# EAGLE board version1 (EAGLE 6.1)
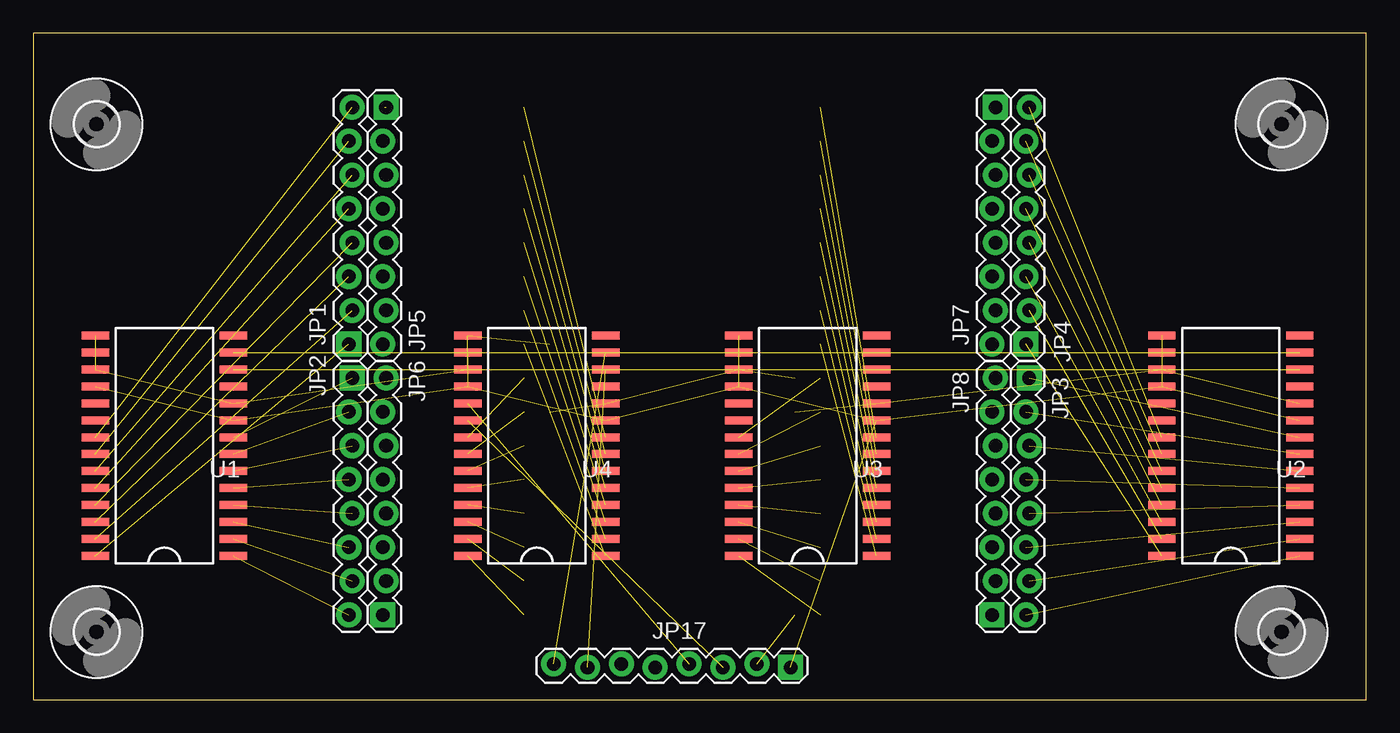
[diagram p0: board, top side]
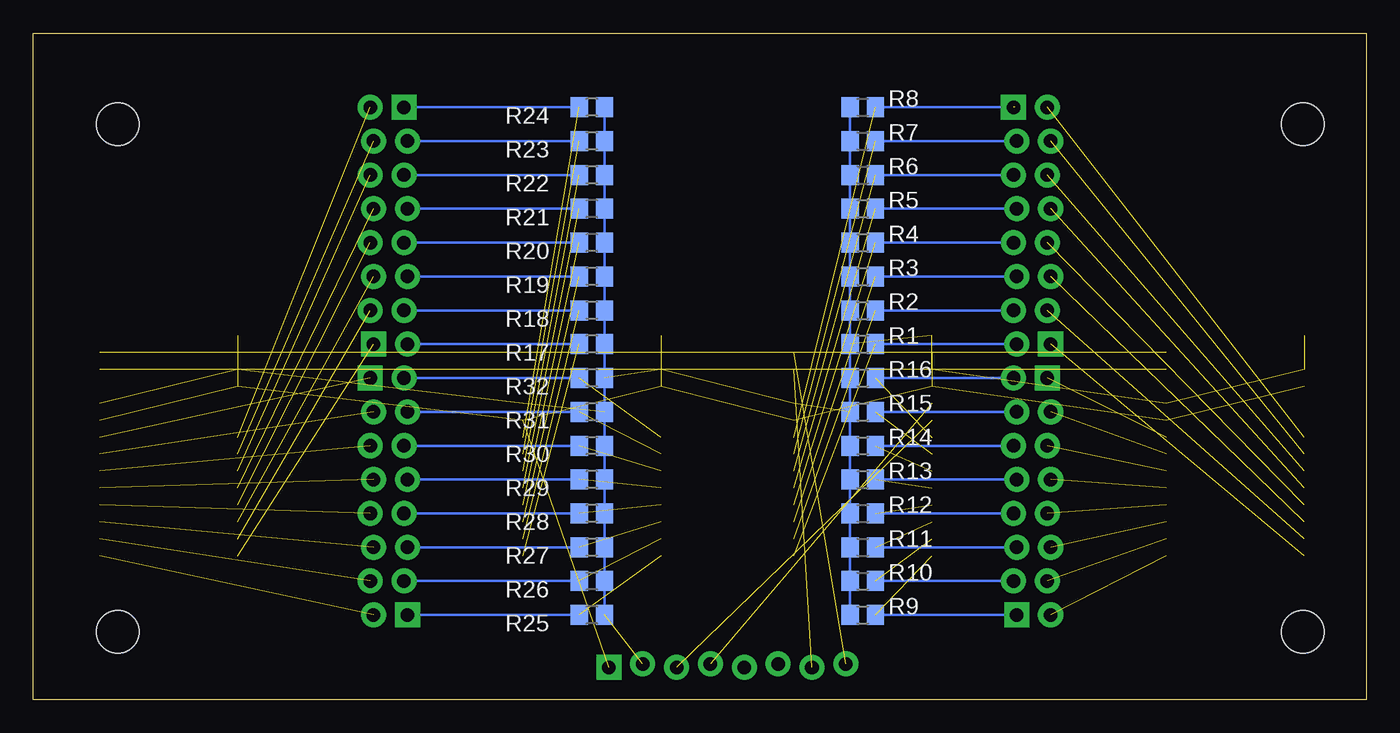
[diagram p1: board, bottom side, seen from below]

Size 100 x 50 mm. Coordinates in mm from the lower left corner, seen from the top.
Outline: 100,0 100,50 0,50 0,0 100,0
Copper layers (1*16): Top 0.035mm / dielectric 1.5mm / Bottom 0.035mm
Design rules: minimum track width 6mil, minimum drill 12mil, track to track 8mil, track to pad 8mil, pad to pad 8mil, via to via 8mil, smd to smd 0mil, copper to edge 10mil, drill to drill 13mil, minimum pad ring 10mil, minimum via ring 6mil, stop-mask expansion 2mil, vias tented up to drill 100mil, thermal gap 10mil
Net classes: 0 default: width 0.203 mm, drill 0.254 mm, clearance 0.203 mm; 1 power: width 0.406 mm, drill 0.305 mm, clearance 0.203 mm to class 0, clearance 0.254 mm

## Footprints (pad centres in the part's own frame; a part is rotated, then mirrored left to right if it is on the bottom)
3,2 = hole 3.2: 0,0
1X08_LOCK = drill 1.016 pad 1.88 square: 1 0,0.127 | drill 1.016 pad 1.88: 2 2.54,-0.127; 3 5.08,0.127; 4 7.62,-0.127; 5 10.16,0.127; 6 12.7,-0.127; 7 15.24,0.127; 8 17.78,-0.127
R0805 = smd 1.3 x 1.5: 1 -0.95,0; 2 0.95,0
MCP23017A = smd 2.05 x 0.6: 1 -5.177,8.255; 2 -5.177,6.985; 3 -5.177,5.715; 4 -5.177,4.445; 5 -5.177,3.175; 6 -5.177,1.905; 7 -5.177,0.635; 8 -5.177,-0.635; 9 -5.177,-1.905; 10 -5.177,-3.175; 11 -5.177,-4.445; 12 -5.177,-5.715; 13 -5.177,-6.985; 14 -5.177,-8.255; 15 5.177,-8.255; 16 5.177,-6.985; 17 5.177,-5.715; 18 5.177,-4.445; 19 5.177,-3.175; 20 5.177,-1.905; 21 5.177,-0.635; 22 5.177,0.635; 23 5.177,1.905; 24 5.177,3.175; 25 5.177,4.445; 26 5.177,5.715; 27 5.177,6.985; 28 5.177,8.255

## Placement (x,y rotation side)
H1  MOUNT-HOLE3.2  [3,2]  93.65,5.08 90 top
H2  MOUNT-HOLE3.2  [3,2]  93.65,43.18 90 top
H3  MOUNT-HOLE3.2  [3,2]  4.75,43.18 90 top
H4  MOUNT-HOLE3.2  [3,2]  4.75,5.08 90 top
JP1  [1X08_LOCK]  23.8,26.67 90 top
JP2  [1X08_LOCK]  23.8,24.13 270 top
JP3  [1X08_LOCK]  74.6,24.13 270 top
JP4  [1X08_LOCK]  74.6,26.67 90 top
JP5  [1X08_LOCK]  26.34,44.45 270 top
JP6  [1X08_LOCK]  26.34,6.35 90 top
JP7  [1X08_LOCK]  72.06,44.45 270 top
JP8  [1X08_LOCK]  72.06,6.35 90 top
JP17  [1X08_LOCK]  56.82,2.54 180 top
R1  [R0805]  37.77,26.67 0 bottom
R2  [R0805]  37.77,29.21 0 bottom
R3  [R0805]  37.77,31.75 0 bottom
R4  [R0805]  37.77,34.29 0 bottom
R5  [R0805]  37.77,36.83 0 bottom
R6  [R0805]  37.77,39.37 0 bottom
R7  [R0805]  37.77,41.91 0 bottom
R8  [R0805]  37.77,44.45 0 bottom
R9  [R0805]  37.77,6.35 0 bottom
R10  [R0805]  37.77,8.89 0 bottom
R11  [R0805]  37.77,11.43 0 bottom
R12  [R0805]  37.77,13.97 0 bottom
R13  [R0805]  37.77,16.51 0 bottom
R14  [R0805]  37.77,19.05 0 bottom
R15  [R0805]  37.77,21.59 0 bottom
R16  [R0805]  37.77,24.13 0 bottom
R17  [R0805]  58.09,26.67 180 bottom
R18  [R0805]  58.09,29.21 180 bottom
R19  [R0805]  58.09,31.75 180 bottom
R20  [R0805]  58.09,34.29 180 bottom
R21  [R0805]  58.09,36.83 180 bottom
R22  [R0805]  58.09,39.37 180 bottom
R23  [R0805]  58.09,41.91 180 bottom
R24  [R0805]  58.09,44.45 180 bottom
R25  [R0805]  58.09,6.35 180 bottom
R26  [R0805]  58.09,8.89 180 bottom
R27  [R0805]  58.09,11.43 180 bottom
R28  [R0805]  58.09,13.97 180 bottom
R29  [R0805]  58.09,16.51 180 bottom
R30  [R0805]  58.09,19.05 180 bottom
R31  [R0805]  58.09,21.59 180 bottom
R32  [R0805]  58.09,24.13 180 bottom
U1  LIGHTSA  [MCP23017A]  9.83,19.05 180 top
U2  LIGHTSB  [MCP23017A]  89.84,19.05 180 top
U3  ButtonB  [MCP23017A]  58.09,19.05 180 top
U4  ButtonA  [MCP23017A]  37.77,19.05 180 top

## Library data of the parts
H1-H4 = holes
JP1-JP8 JP17 = SparkFun
R1-R32 = rcl
U1-U4 = brv_v6_2

## Nets
GND: JP17.2 R1.1 R2.1 R3.1 R4.1 R5.1 R6.1 R7.1 R8.1 R9.1 R10.1 R11.1 R12.1 R13.1 R14.1 R15.1 R16.1 R17.1 R18.1 R19.1 R20.1 R21.1 R22.1 R23.1 R24.1 R25.1 R26.1 R27.1 R28.1 R29.1 R30.1 R31.1 R32.1 U1.10 U1.15 U1.16 U1.17 U2.10 U2.16 U2.17 U3.10 U3.17 U4.10 U4.15 U4.17
INC: U3.20
IND: U3.19
INTA: JP17.3 U4.20
INTB: JP17.4 U4.19
INTC: JP17.5
INTD: JP17.6
N$1: JP1.1 U1.28
N$2: JP1.2 U1.27
N$3: JP1.3 U1.26
N$4: JP1.4 U1.25
N$5: JP1.5 U1.24
N$6: JP1.6 U1.23
N$7: JP1.7 U1.22
N$8: JP1.8 U1.21
N$9: JP2.1 U1.8
N$10: JP2.2 U1.7
N$11: JP2.3 U1.6
N$12: JP2.4 U1.5
N$13: JP2.5 U1.4
N$14: JP2.6 U1.3
N$15: JP2.7 U1.2
N$16: JP2.8 U1.1
N$17: JP3.1 U2.8
N$18: JP3.2 U2.7
N$19: JP3.3 U2.6
N$20: JP3.4 U2.5
N$21: JP3.5 U2.4
N$22: JP3.6 U2.3
N$23: JP3.7 U2.2
N$24: JP3.8 U2.1
N$25: JP4.1 U2.28
N$26: JP4.2 U2.27
N$27: JP4.3 U2.26
N$28: JP4.4 U2.25
N$29: JP4.5 U2.24
N$30: JP4.6 U2.23
N$31: JP4.7 U2.22
N$32: JP4.8 U2.21
N$33: JP5.1 R8.2 U4.8
N$34: JP5.2 R7.2 U4.7
N$35: JP5.3 R6.2 U4.6
N$36: JP5.4 R5.2 U4.5
N$37: JP5.5 R4.2 U4.4
N$38: JP5.6 R3.2 U4.3
N$39: JP5.7 R2.2 U4.2
N$40: JP5.8 R1.2 U4.1
N$41: JP6.1 R9.2 U4.28
N$42: JP6.2 R10.2 U4.27
N$43: JP6.3 R11.2 U4.26
N$44: JP6.4 R12.2 U4.25
N$45: JP6.5 R13.2 U4.24
N$46: JP6.6 R14.2 U4.23
N$47: JP6.7 R15.2 U4.22
N$48: JP6.8 R16.2 U4.21
N$49: JP7.1 R24.2 U3.8
N$50: JP7.2 R23.2 U3.7
N$51: JP7.3 R22.2 U3.6
N$52: JP7.4 R21.2 U3.5
N$53: JP7.5 R20.2 U3.4
N$54: JP7.6 R19.2 U3.3
N$55: JP7.7 R18.2 U3.2
N$56: JP7.8 R17.2 U3.1
N$57: JP8.1 R25.2 U3.28
N$58: JP8.2 R26.2 U3.27
N$59: JP8.3 R27.2 U3.26
N$60: JP8.4 R28.2 U3.25
N$61: JP8.5 R29.2 U3.24
N$62: JP8.6 R30.2 U3.23
N$63: JP8.7 R31.2 U3.22
N$64: JP8.8 R32.2 U3.21
SCL: JP17.7 U1.12 U2.12 U3.12 U4.12
SDA: JP17.8 U1.13 U2.13 U3.13 U4.13
VCC: JP17.1 U1.9 U1.18 U2.9 U2.15 U2.18 U3.9 U3.15 U3.16 U3.18 U4.9 U4.16 U4.18

## Tracks (layer width: path | path; a pad name or v marks a point on that pad's centre or on a via)
GND  (14 unrouted)
  Bottom 0.203: R8.1 R7.1 R6.1 R5.1 R4.1 R3.1 R2.1 R1.1 R16.1 R15.1 R14.1 R13.1 R12.1 R11.1 R10.1 R9.1 | R25.1 R26.1 R27.1 R28.1 R29.1 R30.1 R31.1 R32.1 R17.1 R18.1 R19.1 R20.1 R21.1 R22.1 R23.1 R24.1
INTA  (1 unrouted)
INTB  (1 unrouted)
N$1  (1 unrouted)
N$2  (1 unrouted)
N$3  (1 unrouted)
N$4  (1 unrouted)
N$5  (1 unrouted)
N$6  (1 unrouted)
N$7  (1 unrouted)
N$8  (1 unrouted)
N$9  (1 unrouted)
N$10  (1 unrouted)
N$11  (1 unrouted)
N$12  (1 unrouted)
N$13  (1 unrouted)
N$14  (1 unrouted)
N$15  (1 unrouted)
N$16  (1 unrouted)
N$17  (1 unrouted)
N$18  (1 unrouted)
N$19  (1 unrouted)
N$20  (1 unrouted)
N$21  (1 unrouted)
N$22  (1 unrouted)
N$23  (1 unrouted)
N$24  (1 unrouted)
N$25  (1 unrouted)
N$26  (1 unrouted)
N$27  (1 unrouted)
N$28  (1 unrouted)
N$29  (1 unrouted)
N$30  (1 unrouted)
N$31  (1 unrouted)
N$32  (1 unrouted)
N$33  (2 unrouted)
  Bottom 0.203: R8.2 26.34,44.45
N$34  (1 unrouted)
  Bottom 0.203: JP5.2 R7.2
N$35  (1 unrouted)
  Bottom 0.203: R6.2 JP5.3
N$36  (1 unrouted)
  Bottom 0.203: JP5.4 R5.2
N$37  (1 unrouted)
  Bottom 0.203: R4.2 JP5.5
N$38  (1 unrouted)
  Bottom 0.203: JP5.6 R3.2
N$39  (1 unrouted)
  Bottom 0.203: R2.2 JP5.7
N$40  (1 unrouted)
  Bottom 0.203: JP5.8 R1.2
N$41  (1 unrouted)
  Bottom 0.203: R9.2 JP6.1
N$42  (1 unrouted)
  Bottom 0.203: JP6.2 R10.2
N$43  (1 unrouted)
  Bottom 0.203: R11.2 JP6.3
N$44  (1 unrouted)
  Bottom 0.203: JP6.4 R12.2
N$45  (1 unrouted)
  Bottom 0.203: JP6.5 R13.2
N$46  (1 unrouted)
  Bottom 0.203: JP6.6 R14.2
N$47  (1 unrouted)
  Bottom 0.203: JP6.7 R15.2
N$48  (1 unrouted)
  Bottom 0.203: R16.2 JP6.8
N$49  (1 unrouted)
  Bottom 0.203: JP7.1 R24.2
N$50  (1 unrouted)
  Bottom 0.203: JP7.2 R23.2
N$51  (1 unrouted)
  Bottom 0.203: JP7.3 R22.2
N$52  (1 unrouted)
  Bottom 0.203: JP7.4 R21.2
N$53  (1 unrouted)
  Bottom 0.203: JP7.5 R20.2
N$54  (1 unrouted)
  Bottom 0.203: JP7.6 R19.2
N$55  (1 unrouted)
  Bottom 0.203: JP7.7 R18.2
N$56  (1 unrouted)
  Bottom 0.203: JP7.8 R17.2
N$57  (1 unrouted)
  Bottom 0.203: R25.2 JP8.1
N$58  (1 unrouted)
  Bottom 0.203: JP8.2 R26.2
N$59  (1 unrouted)
  Bottom 0.203: JP8.3 R27.2
N$60  (1 unrouted)
  Bottom 0.203: JP8.4 R28.2
N$61  (1 unrouted)
  Bottom 0.203: JP8.5 R29.2
N$62  (1 unrouted)
  Bottom 0.203: JP8.6 59.36,19.05 R30.2
N$63  (1 unrouted)
  Bottom 0.203: JP8.7 R31.2
N$64  (1 unrouted)
  Bottom 0.203: JP8.8 R32.2
SCL  (4 unrouted)
SDA  (4 unrouted)
VCC  (12 unrouted)

## Text on the board
tDocu: A0 | B7 | Speed Of Light | B7 | A0 | IO Controller | Rev1 | 4/12/2013 | Ben Viall | Player1 | Player2 | LIGHTS | BUTTONS | BUTTONS | LIGHTS | B0 | A7 | A7 | B0 | 5V
bDocu: GND | SCL | INTD | INTC | INTB | INTA | VCC | SDA